# EAGLE board cat layout (EAGLE 6.5.0)
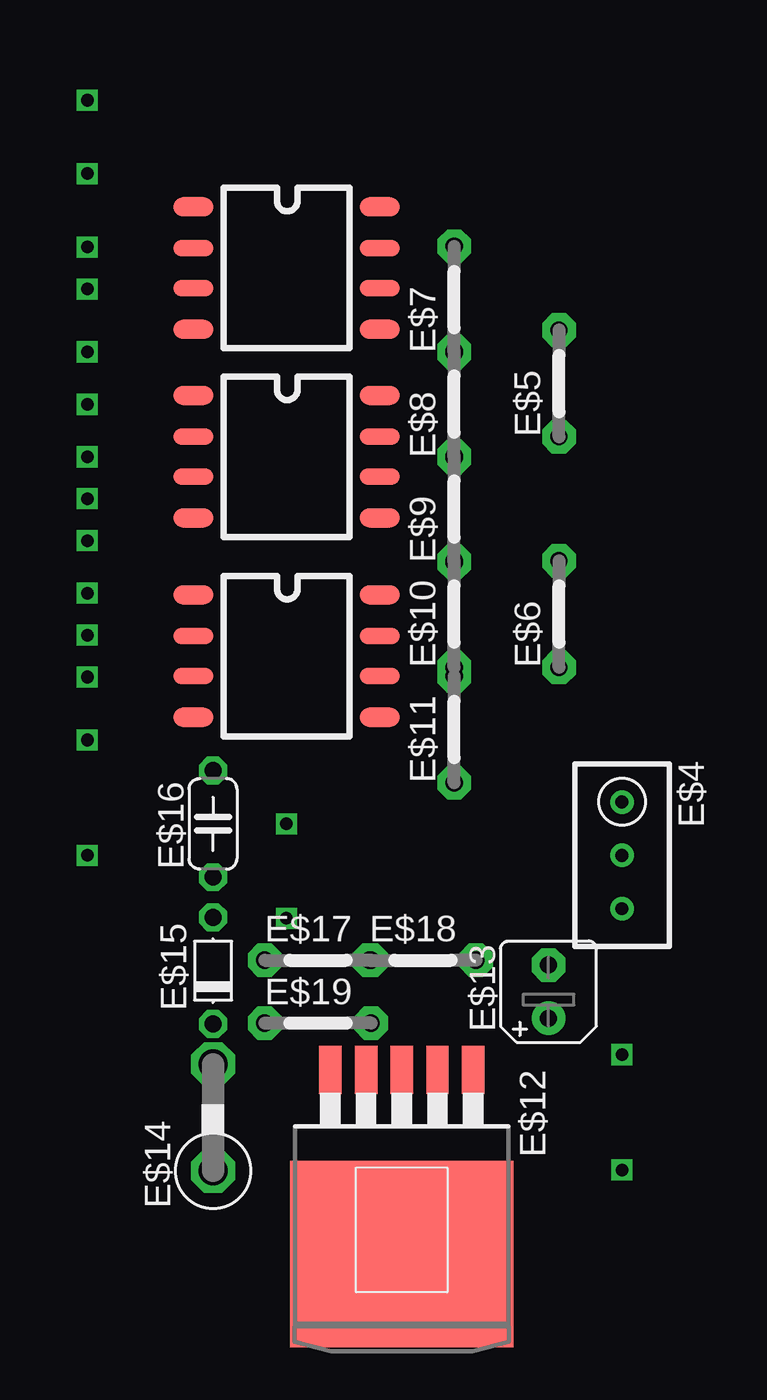
[diagram p0: board, top side]
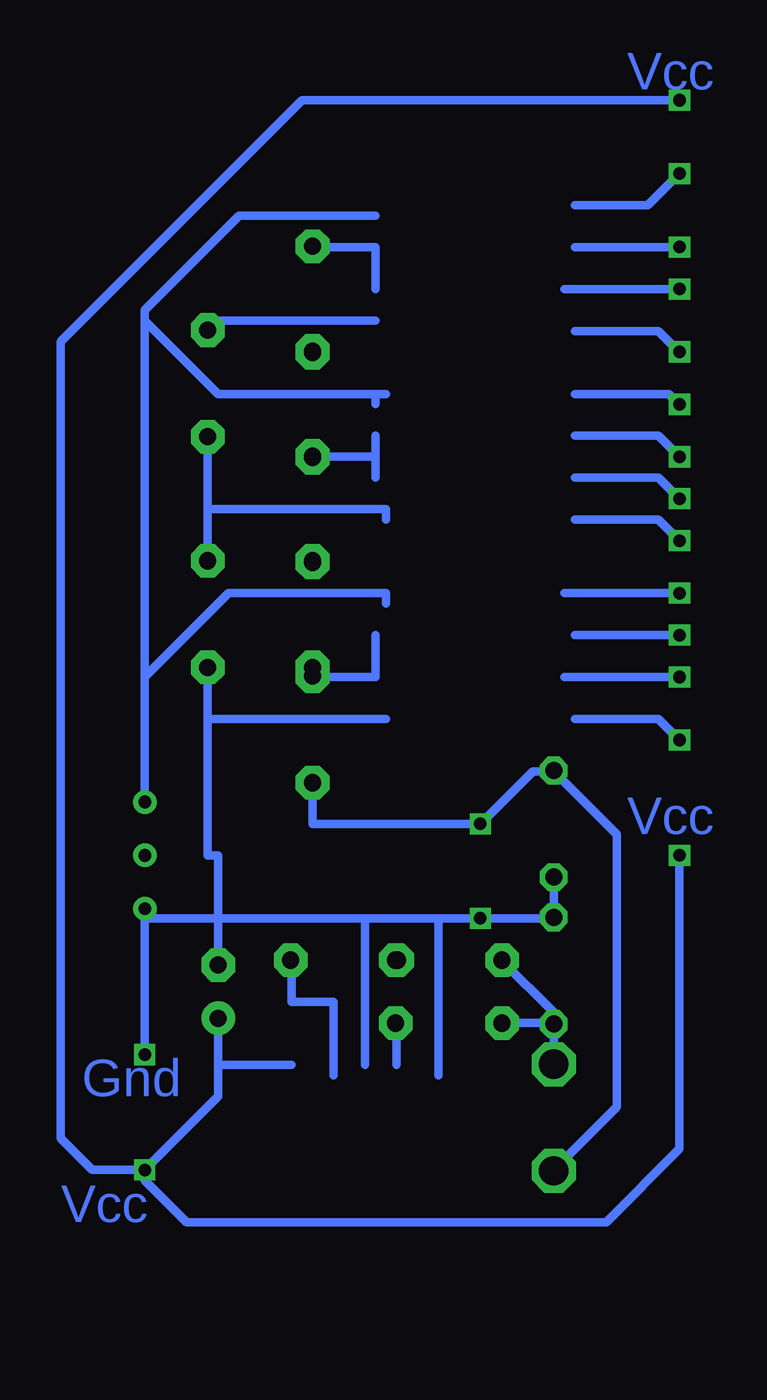
[diagram p1: board, bottom side, seen from below]

No outline drawn. Coordinates in mm, seen from the top.
Copper layers (1*16): Top 0.035mm / dielectric 1.5mm / Bottom 0.035mm
Design rules "default": minimum track width 10mil, minimum drill 24mil, track to track 8mil, track to pad 8mil, pad to pad 8mil, via to via 8mil, smd to smd 8mil, copper to edge 40mil, drill to drill 8mil, minimum pad ring 10mil, minimum via ring 8mil, stop-mask expansion 4mil, vias tented up to drill 0mil, thermal gap 10mil

## Footprints (pad centres in the part's own frame; a part is rotated, then mirrored left to right if it is on the bottom)
SO8(S8)-PADS = smd 1.905 x 0.9: 1 -4.445,2.917; 4 -4.445,-2.917; 5 4.445,-2.917; 8 4.445,2.917 | smd 1.905 x 0.78: 2 -4.445,0.953; 3 -4.445,-0.953; 6 4.445,-0.953; 7 4.445,0.953
RTRIM3296W = drill 0.61: 1 0,-2.54; 2 0,0; 3 0,2.54
05 = drill 0.813 pad 1.6 octagon: 1 -2.54,0; 2 2.54,0
DDPAK5(Q) = smd 1.067 x 2.286: 1 -3.404,-8.763; 2 -1.702,-8.763; 3 0,-8.763; 4 1.702,-8.763; 5 3.404,-8.763 | smd 10.668 x 8.89: TAB 0,0
B45181A = drill 0.813 pad 1.6: + -1.27,0 | drill 0.813 pad 1.6 octagon: - 1.27,0
C1702-05 = drill 1.397 octagon: A 2.54,0; C -2.54,0
D-5 = drill 0.813 octagon: A 2.54,0; C -2.54,0
C050-024X044 = drill 0.813 octagon: 1 -2.54,0; 2 2.54,0

## Placement (x,y rotation side)
E$1  [SO8(S8)-PADS]  4.5,76.5 0 top
E$2  [SO8(S8)-PADS]  4.5,67.5 0 top
E$3  [SO8(S8)-PADS]  4.5,58 0 top
E$4  [RTRIM3296W]  20.5,48.5 180 top
E$5  [05]  17.5,71 90 top
E$6  [05]  17.5,60 90 top
E$7  [05]  12.5,75 90 top
E$8  [05]  12.5,70 90 top
E$9  [05]  12.5,65 90 top
E$10  [05]  12.5,60 90 top
E$11  [05]  12.5,54.5 90 top
E$12  [DDPAK5(Q)]  10,29.5 180 top
E$13  [B45181A]  17,42 90 top
E$14  [C1702-05]  1,36 90 top
E$15  [D-5]  1,43 90 top
E$16  [C050-024X044]  1,50 90 top
E$17  [05]  6,43.5 0 top
E$18  [05]  11,43.5 0 top
E$19  [05]  6,40.5 0 top

## Library data of the parts
E$1-E$3 E$12 = PowerProducts
E$4 E$13-E$15 = ref-packages-longpad
E$5-E$11 E$17-E$19 = Misc
E$16 = PAsystem

## Tracks (layer width: path | path; a pad name or v marks a point on that pad's centre or on a via)
S$1
  Bottom 0.406: 9,60.5 9,61 16.5,61 20.5,57 | 9.5,79 16,79 20.5,74.5 20.5,74 | 20.5,51 20.5,57 | 20.5,57 20.5,74 | 9,70.5 17,70.5 20.5,74
S$2  (via drill 0.6)
  Bottom 0.406: 0,79.5 -3.5,79.5 v-5,81
S$3
  Bottom 0.406: 9.5,74 14.5,74 17.5,74 17.5,73.5
S$4
  Bottom 0.406: 9,64.5 9,65 17.5,65 | 17.5,65 17.5,68.5 | 17.5,65 17.5,62.5
S$5
  Bottom 0.406: 13,77.5 9.5,77.5 9.5,75.5
S$6
  Bottom 0.406: 9.5,68.5 9.5,67.5 | 9.5,67.5 12.5,67.5 | 9.5,67.5 9.5,66.5
S$7
  Bottom 0.406: 9.5,59 9.5,57 12.5,57
S$9  (via drill 0.6)
  Bottom 0.406: 17,45.5 17,48.5 17.5,48.5 17.5,55 | 17.5,57.5 17.5,55 | 17.5,55 9,55 | 10,45.5 17,45.5 | 17,45.5 17,43 | 17,45.5 20,45.5 20.5,46 20.5,45.5 | 10,38.5 10,45.5 | 10,45.5 6.5,45.5 6.5,38 | 20.5,45.5 1,45.5 1,47.5 | 20.5,45.5 v20.5,39
S$10  (via drill 0.6)
  Bottom 0.406: 0,77.5 v-5,77.5
S$11  (via drill 0.6)
  Bottom 0.406: 0.5,75.5 v-5,75.5
S$12  (via drill 0.6)
  Bottom 0.406: 0,73.5 -4,73.5 v-5,72.5
S$13  (via drill 0.6)
  Bottom 0.406: 0.5,61 v-5,61
S$14  (via drill 0.6)
  Bottom 0.406: 0,68.5 -4,68.5 v-5,67.5
S$15  (via drill 0.6)
  Bottom 0.406: 0,66.5 -4,66.5 v-5,65.5
S$16  (via drill 0.6)
  Bottom 0.406: 0,64.5 -4,64.5 v-5,63.5
S$17  (via drill 0.6)
  Bottom 0.406: 0,70.5 -4.5,70.5 v-5,70
S$18  (via drill 0.6)
  Bottom 0.406: 0,59 v-5,59
S$19  (via drill 0.6)
  Bottom 0.406: 0.5,57 v-5,57
S$20  (via drill 0.6)
  Bottom 0.406: 0,55 -4,55 v-5,54
S$21
  Bottom 0.406: 3.5,43.5 1,41 1,40.5 | 1,40.5 1,38.5 | 1,40.5 3.5,40.5
S$22  (via drill 0.6)
  Bottom 0.406: 13.5,38.5 17,38.5 | 17,41 17,38.5 | 17,38.5 17,37 v20.5,33.5 | v20.5,33.5 23,33.5 24.5,35 24.5,73 13,84.5 v-5,84.5 | v20.5,33.5 20.5,33 18.5,31 -1.5,31 -5,34.5 v-5,48.5
S$23
  Bottom 0.406: 9.5,70 9.5,70.5
S$25
  Bottom 0.406: 8.5,40.5 8.5,38.5
S$26  (via drill 0.6)
  other vias: 4.5,45.5
S$27
  Bottom 0.406: 11.5,38 11.5,41.5 13.5,41.5 13.5,43.5
S$28  (via drill 0.6)
  Bottom 0.406: 1,33.5 -2,36.5 -2,49.5 1,52.5 2,52.5 v4.5,50 12.5,50 12.5,52

## Text on the board
Bottom: Vcc | Vcc | Gnd | Vcc